# Altium PCB MB694.PCBDOC
Units mm, origin at the board's own origin, x right, y up, seen from the top; angles counter-clockwise.
Board outline 84.13 x 44.13 mm, 4 copper layers (TopLayer, MidLayer1, InternalPlane1, BottomLayer); 23 components, 40 nets, 166 pads, 103 vias.
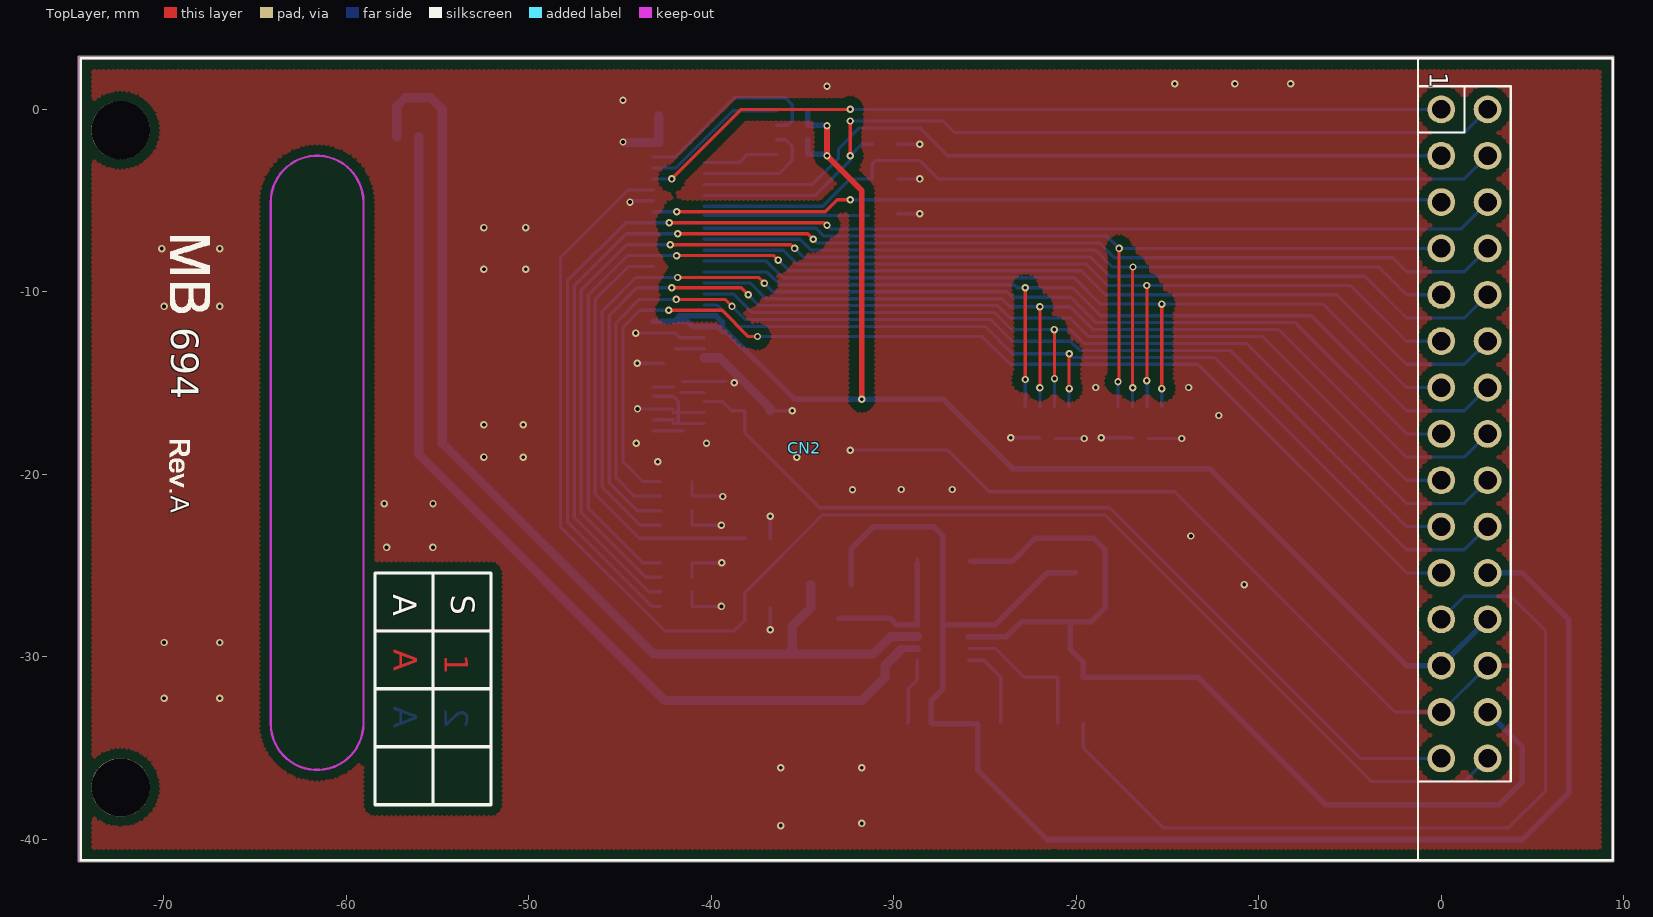
[diagram p0: TopLayer view]
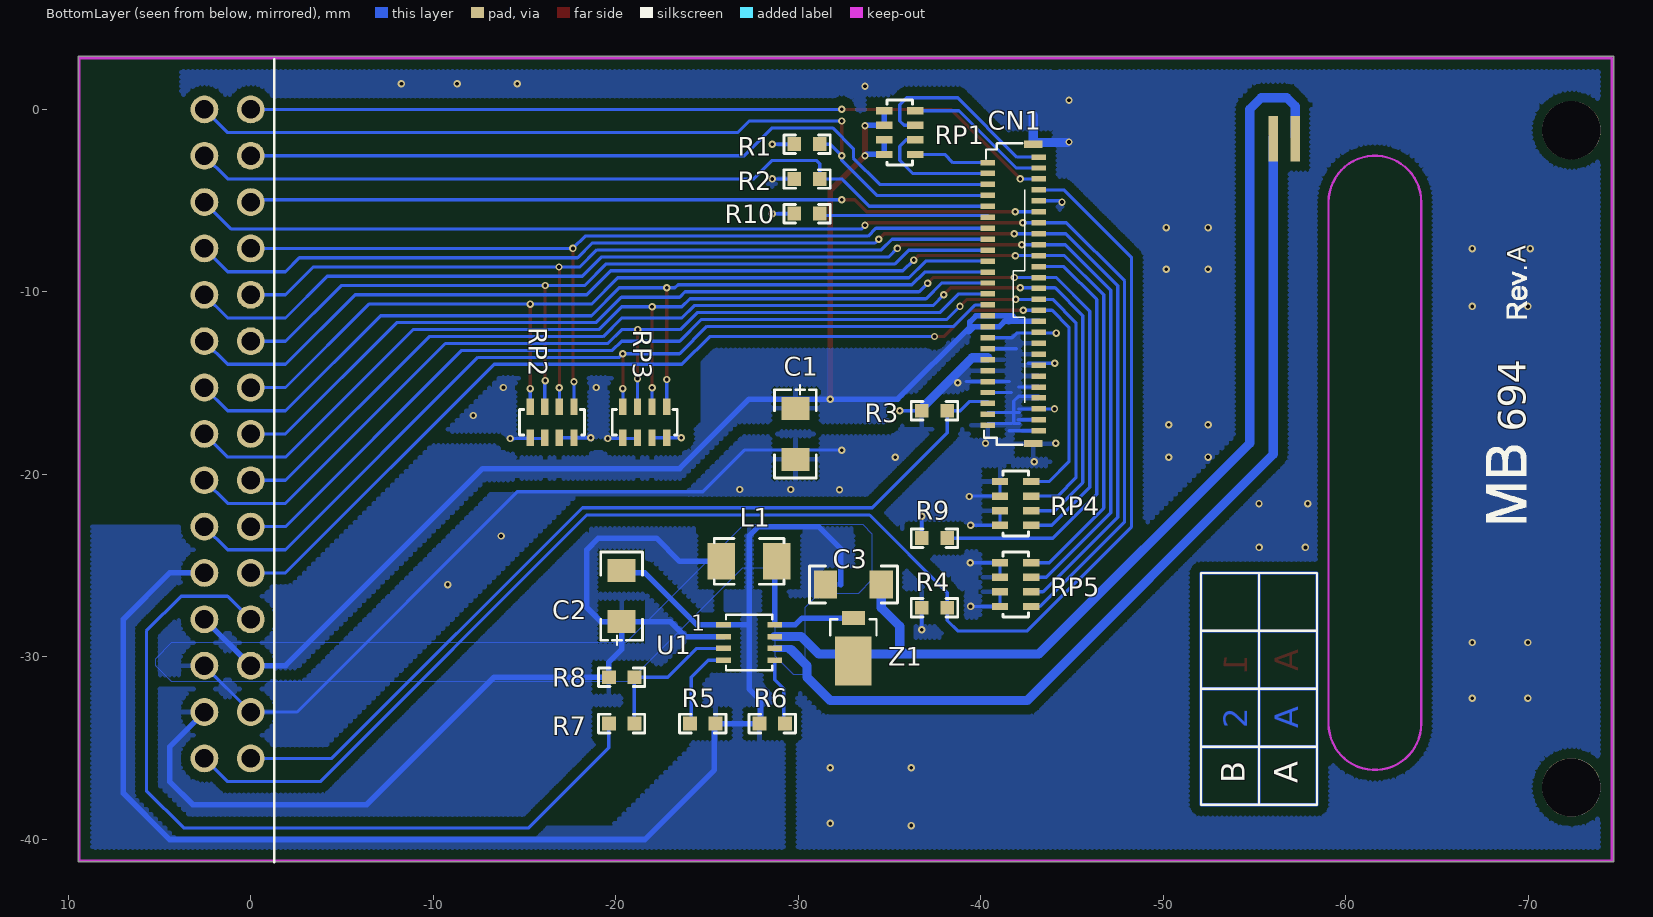
[diagram p1: BottomLayer view, seen from below]
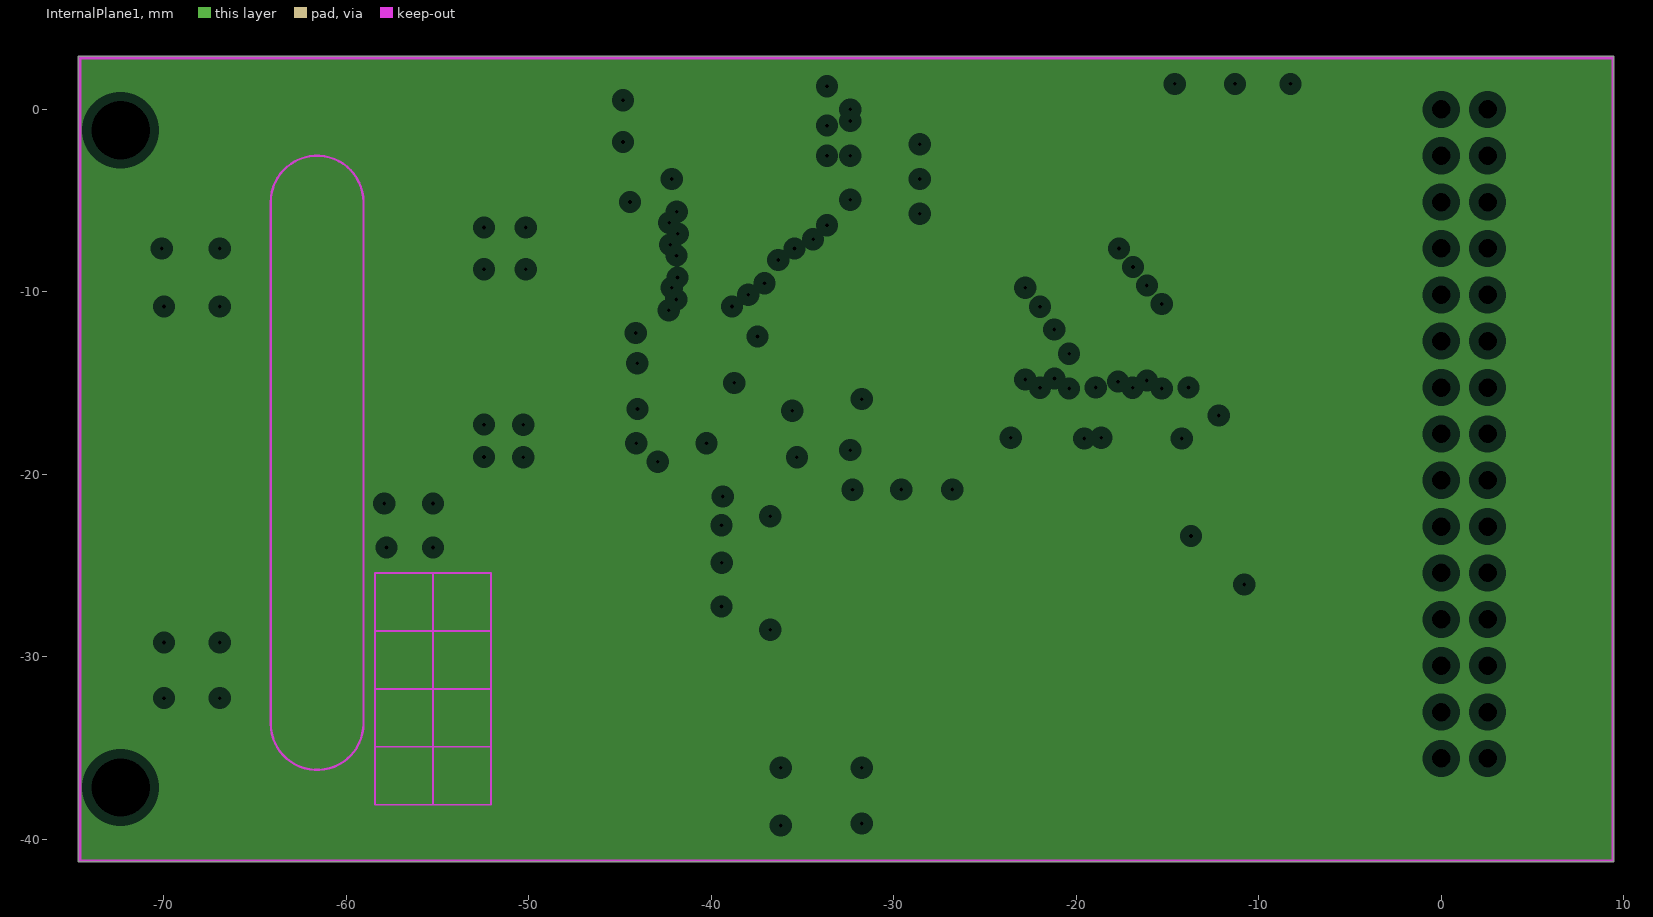
[diagram p2: InternalPlane1, clearances drawn from the general rule]

## Layer stack, top to bottom
TopLayer: signal copper 0.0356
Dielectric: dielectric 0.32, FR-4, Dk 4.8
MidLayer1: signal copper 0.0356
Dielectric: dielectric 0.32, FR-4, Dk 4.8
InternalPlane1: plane copper 0.0356
Dielectric: dielectric 0.32, FR-4, Dk 4.8
BottomLayer: signal copper 0.0356

## Board outline
-74.678,-41.219 9.449,-41.219 9.449,2.908 -74.678,2.908

## Design rules (kind name [scope] priority, off if disabled: settings)
Clearance Clearance_2 [(InPoly)] p1: gap=0.508
Clearance [All] p2: gap=0.203
ComponentClearance [All] p1 off: gap=0.254 collisioncheckmode=0
PlaneClearance [All] p1: clearance=0.508
PlaneConnect [All] p1: planeconnectstyle=Relief reliefexpansion=0.508 reliefentries=4 reliefconductorwidth=0.254 reliefairgap=0.254
PolygonConnect [All] p1: connectstyle=Relief reliefconductorwidth=0.254 reliefentries=4 polygonreliefangle="90 Angle"
RoutingLayers [All] p1: top layer_v5=TRUE mid layer 1_v5=FALSE bottom layer_v5=TRUE
RoutingVias RoutingVias_1 [All] p1: holewidth=0.203 width=0.406 viastyle="Through Hole" minholewidth=0.203 minwidth=0.406 maxholewidth=0.711 maxwidth=1.27
SolderMaskExpansion [All] p1: expansion=0.102
TestPointUsage [All] p1: valid=0 allowmultiple=FALSE
Testpoint [All] p1: side=15 testpointundercomponent=TRUE minsize=1.016 maxsize=2.54 preferedsize=1.524 minholesize=0.508 maxholesize=1.016 preferedholesize=0.813 testpointgrid=0.025 style=1023 order=1234567890
Width Width_1 [InNet('BLGND')] p1: maxlimit=7.62 minlimit=0.178 preferedwidth=0.305
Width Width_2 [InNet('BLVDD')] p2: maxlimit=7.62 minlimit=0.178 preferedwidth=0.305
Width Width_3 [InNet('VDD')] p3: maxlimit=7.62 minlimit=0.178 preferedwidth=0.305
Width [All] p4: maxlimit=7.62 minlimit=0.178 preferedwidth=0.178
14 further rules are at their usual default settings.

## Classes and differential pairs
component class ColorLCD_Module: C1 C2 CN1 L1 R1 R2 R3 R4 R5 R6 R7 R8 U2 Z1
component class ColorLCD_ModuleA: C1 C2 CN1 L1 R1 R2 R3 R4 R5 R6 R7 R8 RP1 RP2 RP3 RP4 RP5 U2 Z1

## Components (designator, comment, footprint, x,y, rotation, side; value= is the part's Value field where it differs from the comment)
C1 "1uF/50V" TAN-A -29.845,-17.78 r270 bottom
C2 "2.2uF" TAN-A -20.32,-26.67 r90 bottom
C3 "1uF/50V" 1206 -33.02,-26.035 r180 bottom
CN1 "FH26-51S-0.3SHW(05)" AM240320B -67.132,-0.151 r180 bottom
CN2 "Connector to Mother board" AM240*320B 5.08,0 r0 top
L1 "22uH" 3225 -27.305,-24.765 r0 bottom
R1 "do not fit" 0603 -30.48,-1.905 r180 bottom
R2 "do not fit" 0603 -30.48,-3.81 r180 bottom
R3 "4K7" 0603 -37.465,-16.51 r180 bottom
R4 "4K7" 0603 -37.465,-27.305 r180 bottom
R5 "100K" 0603 -24.765,-33.655 r0 bottom
R6 "15" 0603 -28.575,-33.655 r180 bottom
R7 "0" 0603 -20.32,-33.655 r0 bottom
R8 "do not fit" 0603 -20.32,-31.115 r0 bottom
R9 "4K7" 0603 -37.465,-23.495 r180 bottom
R10 "4K7" 0603 -30.48,-5.715 r180 bottom
RP1 "10K" RES-4B -35.56,-1.27 r90 bottom
RP2 "do not fit" RES-4B -16.51,-17.145 r0 bottom
RP3 "do not fit" RES-4B -21.59,-17.145 r0 bottom
RP4 "do not fit" RES-4B -41.91,-21.59 r90 bottom
RP5 "do not fit" RES-4B -41.91,-26.035 r90 bottom
U1 "STLD20D-C8" SOT23-8L -27.305,-29.21 r90 bottom
Z1 "STPS1L40M" DO216AA -33.02,-28.575 r90 bottom

## Footprints (in the part's own frame and the unit in brackets; to place one, negate y for a bottom-side part, rotate by r counter-clockwise, add the part's x,y. Pads: shape width x height; smd on the part's side, far side on the other; paste and mask are expansions set on the pad)
0603 [mil]
  rect 30x30 smd: 1(-27.5,0) 2(27.5,0)
  silkscreen extent -50,-20 50,20
1206 [mil]
  rect 50x60 smd: 1(-60,0) 2(60,0)
  silkscreen extent -95,-40 95,40
3225 [mm]
  rect 1.5x2 smd: 1(1.524,0) 2(-1.524,0)
  silkscreen extent -1.91,-1.25 1.91,1.25
AM240*320B [mil]
  round 125.98 hole 125.98 unplated: 0(-3048.94,-1462.72) 0(-3048.94,-1462.72) 0(-3048.94,-45)
  round 60 hole 40: 1(-200,0) 2(-100,0) 3(-200,-100) 4(-100,-100) 5(-200,-200) 6(-100,-200) 7(-200,-300) 8(-100,-300) 9(-200,-400) 10(-100,-400) 11(-200,-500) 12(-100,-500) 13(-200,-600) 14(-100,-600) 15(-200,-700) 16(-100,-700) 17(-200,-800) 18(-100,-800) 19(-200,-900) 20(-100,-900) 21(-200,-1000) 22(-100,-1000) 23(-200,-1100) 24(-100,-1100) 25(-200,-1200) 26(-100,-1200) 27(-200,-1300) 28(-100,-1300) 29(-200,-1400) 30(-100,-1400)
  silkscreen extent -3135,-1620 170,110
AM240320B [mm]
  rect 1x0.4 smd: 0(-24.252,-18.161) 0(-24.252,-1.761)
  rect 0.8x0.3 smd: 1(-23.952,-2.461) 2(-26.752,-2.761) 3(-23.952,-3.061) 4(-26.752,-3.361) 5(-23.952,-3.661) 6(-26.752,-3.961) 7(-23.952,-4.261) 8(-26.752,-4.561) 9(-23.952,-4.861) 10(-26.752,-5.161) 11(-23.952,-5.461) 12(-26.752,-5.761) 13(-23.952,-6.061) 14(-26.752,-6.361) 15(-23.952,-6.661) 16(-26.752,-6.961) 17(-23.952,-7.261) 18(-26.752,-7.561) 19(-23.952,-7.861) 20(-26.752,-8.161) 21(-23.952,-8.461) 22(-26.752,-8.761) 23(-23.952,-9.061) 24(-26.752,-9.361) 25(-23.952,-9.661) 26(-26.752,-9.961) 27(-23.952,-10.261) 28(-26.752,-10.561) 29(-23.952,-10.861) 30(-26.752,-11.161) 31(-23.952,-11.461) 32(-26.752,-11.761) 33(-23.952,-12.061) 34(-26.752,-12.361) 35(-23.952,-12.661) 36(-26.752,-12.961) 37(-23.952,-13.261) 38(-26.752,-13.561) 39(-23.952,-13.861) 40(-26.752,-14.161) 41(-23.952,-14.461) 42(-26.752,-14.761) 43(-23.952,-15.061) 44(-26.752,-15.361) 45(-23.952,-15.661) 46(-26.752,-15.961) 47(-23.952,-16.261) 48(-26.752,-16.561) 49(-23.952,-16.861) 50(-26.752,-17.161) 51(-23.952,-17.461)
  rect 0.508x2.5 smd: 52(-9.902,-1.453) 53(-11.102,-1.453)
  silkscreen extent -65.85,-41.1 -24.72,2.9
DO216AA [mm]
  rect 0.762x1.27 smd: 1(0.699,0)
  rect 2.67x2 smd: 2(-1.653,0)
  silkscreen extent -0.25,-1.27 0.64,1.27
RES-4B [mm]
  rect 0.4x0.889 smd: 1(1.2,-0.851) 2(1.2,0.851) 3(0.4,-0.851) 4(0.4,0.851) 5(-0.4,-0.851) 6(-0.4,0.851) 7(-1.2,-0.851) 8(-1.2,0.851)
  silkscreen extent -1.78,-0.7 1.78,0.7
SOT23-8L [mm]
  rect 0.3x0.8 smd: 1(0.975,1.4) 2(0.325,1.4) 3(-0.325,1.4) 4(-0.975,1.4) 5(-0.975,-1.4) 6(-0.325,-1.4) 7(0.325,-1.4) 8(0.975,-1.4)
  silkscreen extent -1.52,-1.27 1.52,1.27
TAN-A [mil]
  rect 50x60 smd: 1(-55,0) 2(55,0)
  silkscreen extent -105,-45 95,45

## Via types
v1: diameter 0.406, hole 0.203, TopLayer to BottomLayer, 103 vias

## Nets (pads, with @x,y where several pads share a name; then routed paths per layer and width w, separated by ;. In a path a pad name is that pad's centre, name@x,y a point inside that pad or via, vN(x,y) a via of type N, cw(c..) or ccw(c..) an arc to the next point about the centre after c; other vN are vias at no path point)
#RESET: CN1.11 CN2.5 | length 43.3
  TopLayer w0.178: v1(-41.886,-5.612) -33.755,-5.612 -33.096,-4.953 v1(-32.385,-4.953)
  BottomLayer w0.178: CN1.11 v1(-41.886,-5.612) ; v1(-32.385,-4.953) CN2.5@-0.127,-4.953
A: C3.2 CN1.52 U1.7 Z1.2 | length 59.8
  BottomLayer w0.178: -36.068,-29.845 -35.56,-29.337 -35.052,-29.845
  BottomLayer w0.508: CN1.52@-57.23,-1.504 -57.23,0.174 -56.769,0.635 -55.372,0.635 -54.737,0 -54.737,-18.288 -43.18,-29.845 -31.115,-29.845 -30.155,-28.885 U1.7 ; -35.56,-29.845 -35.56,-28.321 -34.544,-27.305 C3.2
BL_CONTROL: CN2.23 R7.2 | length 45.1
  BottomLayer w0.178: R7.2 -19.621,-34.989 -15.24,-39.37 3.683,-39.37 5.715,-37.338 5.715,-28.575 3.81,-26.67 1.27,-26.67 CN2.23
BLGND: C2.2 C3.1 CN2.22 R5.1 R6.1 U1.1 | length 81.6
  BottomLayer w0.305: -32.322,-26.035 -32.322,-24.066 -31.115,-22.86 -27.813,-22.86 -27.305,-23.368 -27.305,-31.75 -27.94,-32.385 R6.1@-27.94,-33.591 ; R6.1 R5.1 -25.4,-33.718 -25.4,-36.195 -21.59,-40.005 4.445,-40.005 6.985,-37.465 6.985,-27.94 4.445,-25.4 CN2.22 ; -27.305,-28.321 -27.219,-28.235 -24.425,-28.235 -21.59,-25.4 C2.2@-20.066,-25.4
BLVDD: C2.1 CN2.28 L1.1 R8.2 U1.2 | length 54.9
  BottomLayer w0.305: U1.2 -23.805,-28.885 -22.987,-28.067 -19.177,-28.067 -18.415,-27.305 -18.415,-24.13 -19.05,-23.495 -22.225,-23.495 -23.495,-24.765 L1.1 ; C2.1 -20.32,-29.591 -19.621,-30.29 R8.2 -13.335,-31.115 -6.35,-38.1 3.175,-38.1 4.445,-36.83 4.445,-34.925 CN2.28
CS: CN1.5 CN2.1 | length 44.8
  TopLayer w0.178: v1(-42.166,-3.812) -38.354,0 v1(-32.385,0)
  BottomLayer w0.178: CN1.5 v1(-42.166,-3.812) ; v1(-32.385,0) CN2.1
DOTCLK: CN1.2 RP1.7 | length 4.2
  BottomLayer w0.178: CN1.2 -38.472,-2.912 -38.03,-2.47 RP1.7
ENABLE: CN1.1 RP1.3 | length 11
  BottomLayer w0.178: CN1.1 -41.982,-2.612 -38.735,0.635 -35.941,0.635 -35.56,0.254 -35.56,-0.635 -35.795,-0.87 RP1.3
GND: C1.2 CN1.0 CN1.9 CN1.33 CN1.34 CN1.35 CN1.36 CN1.37 CN1.38 CN1.39 CN1.40 CN1.41 CN1.42 CN1.43 CN1.44 CN1.45 CN1.47 CN1.48 CN1.49 CN1.50 CN1.51 CN2.26 CN2.27 R1.1 R2.1 R3.1 R4.1 R9.1 R10.1 RP2.2 RP2.4 RP2.6 RP2.8 RP3.2 RP3.4 RP3.6 RP3.8 RP4.2 RP4.4 RP4.6 RP4.8 RP5.2 RP5.4 RP5.6 RP5.8 | length 97.7
  BottomLayer w0.178: v1(-44.45,-5.08) -44.382,-5.012 CN1.9 ; v1(-44.131,-12.257) -41.972,-12.257 -41.717,-12.512 CN1.34 ; v1(-44.049,-13.912) -42.603,-13.912 ; v1(-44.04,-16.412) -42.068,-16.412 ; CN1.51 -41.544,-17.612 ; CN1.49 -42.044,-17.012 ; CN1.45@-43.18,-15.712 -42.073,-15.712 -41.808,-15.977 -41.808,-17.212 -42.118,-17.212 ; CN1.43 -42.066,-15.212 ; -42.118,-16.612 CN1.48@-40.38,-16.612 ; -41.943,-13.112 CN1.36 ; -41.716,-17.212 CN1.50@-40.38,-17.212 ; -41.676,-15.512 CN1.44 ; -41.575,-14.912 -39.197,-14.912 ; RP5.6 RP5.8 v1(-39.44,-27.235) ; RP5.4 RP5.2 v1(-39.427,-24.835) ; RP4.6 RP4.8 v1(-39.44,-22.79) ; RP4.2 RP4.4 -39.389,-21.19 v1(-39.37,-21.209) ; v1(-36.767,-28.511) R4.1 ; R9.1 v1(-36.767,-22.288) ; R3.1 v1(-35.56,-16.51) ; v1(-32.385,-18.669) -27.051,-18.669 -24.765,-20.955 -14.605,-20.955 -2.54,-33.02 CN2.27 CN2.26 ; R10.1 v1(-28.575,-5.715) ; R2.1 v1(-28.575,-3.81) ; R1.1 v1(-28.575,-1.905) ; v1(-23.584,-17.996) RP3.6 ; RP3.4@-21.152,-18.034 v1(-19.558,-18.034) ; v1(-18.631,-17.996) RP2.6 RP2.6@-16.891,-18.015 ; RP2.4@-16.072,-18.034 v1(-14.224,-18.034)
  BottomLayer w0.508: v1@-44.74,-1.812 -42.88,-1.812 -42.88,-0.342 ; CN1.38@-40.38,-13.612 -39.535,-13.612 -36.767,-16.381 R3.1
  other v1: -36.197,-39.243 -31.75,-39.123 -36.195,-36.075 -31.75,-36.075 -69.979,-32.258 -66.931,-32.258 -69.979,-29.21 -66.931,-29.21 -10.797,-26.035 -57.787,-24.003 -55.247,-24.003 -13.716,-23.375 -57.912,-21.597 -55.245,-21.597 -32.258,-20.835 -29.593,-20.828 -26.799,-20.828 -42.926,-19.311 -52.453,-19.05 -50.292,-19.057 -35.306,-19.057 -44.107,-18.297 -40.259,-18.295 -52.453,-17.272 -50.292,-17.279 -12.192,-16.771 -18.925,-15.24 -13.845,-15.24 -38.737,-14.986 -69.979,-10.795 -66.931,-10.795 -52.453,-8.763 -50.167,-8.763 -70.104,-7.627 -66.929,-7.627 -52.453,-6.477 -50.167,-6.477 -44.831,-1.785 -44.831,0.501 -33.655,1.263 -14.607,1.397 -11.305,1.397 -8.257,1.397
HSYNC: CN1.3 RP1.1 | length 8.1
  BottomLayer w0.178: CN1.3 -41.947,-3.212 -38.805,-0.07 RP1.1
K: CN1.53 U1.6 | length 51.8
  BottomLayer w0.381: -29.535,-29.535 U1.6
  BottomLayer w0.508: CN1.53@-56.03,-1.504 -56.03,-18.9 -42.545,-32.385 -31.75,-32.385 -30.48,-31.115 -30.48,-30.48 -29.596,-29.596 -29.562,-29.596
NetL1_2: L1.2 U1.8 Z1.1 | length 8.1
  BottomLayer w0.178: L1.2@-28.705,-24.889 L1.2@-28.705,-24.641
  BottomLayer w0.305: Z1.1 -30.203,-27.877 -29.845,-28.235 U1.8 L1.2@-28.705,-24.889
NetR7_1: R7.1 R8.1 U1.3 | length 8.1
  BottomLayer w0.178: U1.3 -24.44,-29.535 -22.86,-31.115 R8.1 R7.1
NetU1_4: R5.2 U1.4 | length 4.6
  BottomLayer w0.178: U1.4 -25.06,-30.185 -24.13,-31.115 R5.2@-24.13,-33.591
NetU1_5: R6.2 U1.5 | length 3.7
  BottomLayer w0.178: R6.2 -29.21,-33.591 -29.21,-31.75 -28.705,-31.245 U1.5
PD0: CN1.12 R10.2 | length 9
  BottomLayer w0.178: CN1.12@-40.38,-5.812 R10.2@-31.399,-5.812
PD1: CN1.13 CN2.6 RP5.7 | length 72.7
  TopLayer w0.178: v1(-42.302,-6.212) -33.793,-6.212 v1(-33.655,-6.35)
  BottomLayer w0.178: RP5.7 -43.25,-27.235 -47.879,-22.606 -47.879,-9.398 -44.693,-6.212 v1(-42.302,-6.212) ; v1(-33.655,-6.35) -33.445,-6.56 1.06,-6.56 CN2.6
PD2: CN1.14 CN2.7 RP2.7 | length 49.5
  TopLayer w0.178: v1(-17.71,-14.916) -17.653,-14.859 v1(-17.653,-7.62)
  BottomLayer w0.178: CN1.14 -34.255,-6.512 -33.826,-6.941 -18.332,-6.941 v1(-17.653,-7.62) CN2.7 ; RP2.7 v1(-17.71,-14.916)
PD3: CN1.15 CN2.8 RP5.5 | length 71.7
  TopLayer w0.178: v1(-41.829,-6.812) -34.717,-6.812 v1(-34.417,-7.112)
  BottomLayer w0.178: RP5.5 -43.415,-26.435 -47.498,-22.352 -47.498,-9.652 -44.658,-6.812 v1(-41.829,-6.812) ; v1(-34.417,-7.112) -34.207,-7.322 -18.713,-7.322 -17.907,-8.128 -2.667,-8.128 -1.905,-8.89 1.27,-8.89 CN2.8
PD4: CN1.16 CN2.9 RP2.5 | length 49.3
  TopLayer w0.178: v1(-16.91,-15.259) -16.91,-8.655 v1(-16.891,-8.636)
  BottomLayer w0.178: CN1.16 -35.135,-7.112 -34.544,-7.703 -18.967,-7.703 -18.034,-8.636 -3.429,-8.636 -1.905,-10.16 CN2.9 ; RP2.5 v1(-16.91,-15.259)
PD5: CN1.17 CN2.10 RP5.3 | length 70.9
  TopLayer w0.178: v1(-42.245,-7.412) -35.641,-7.412 v1(-35.433,-7.62)
  BottomLayer w0.178: RP5.3 -43.58,-25.635 -47.117,-22.098 -47.117,-9.906 -44.623,-7.412 v1(-42.245,-7.412) ; v1(-35.433,-7.62) -34.969,-8.084 -19.221,-8.084 -18.161,-9.144 -4.191,-9.144 -1.905,-11.43 1.27,-11.43 CN2.10
PD6: CN1.18 CN2.11 RP2.3 | length 49.1
  TopLayer w0.178: v1(-16.129,-14.859) v1(-16.129,-9.652)
  BottomLayer w0.178: CN1.18 -36.059,-7.712 -35.306,-8.465 -19.475,-8.465 -18.288,-9.652 -4.953,-9.652 -1.905,-12.7 CN2.11 ; RP2.3 v1@-16.11,-14.878
PD7: CN1.19 CN2.12 RP5.1 | length 70.1
  TopLayer w0.178: v1(-41.899,-8.012) -36.565,-8.012 v1(-36.322,-8.255)
  BottomLayer w0.178: RP5.1 -43.745,-24.835 -46.736,-21.844 -46.736,-10.16 -44.588,-8.012 v1(-41.899,-8.012) ; v1(-36.322,-8.255) -35.731,-8.846 -19.729,-8.846 -18.415,-10.16 -5.715,-10.16 -1.905,-13.97 1.27,-13.97 CN2.12
PD8: CN1.20 CN2.13 RP2.1 | length 48.9
  TopLayer w0.178: v1(-15.31,-15.297) v1(-15.31,-10.668)
  BottomLayer w0.178: CN1.20 -36.983,-8.312 -36.068,-9.227 -20.11,-9.227 -18.669,-10.668 -6.477,-10.668 -1.905,-15.24 CN2.13 ; RP2.1 v1(-15.31,-15.297)
PD9: CN1.21 R9.2 | length 23.8
  BottomLayer w0.178: CN1.21 -44.553,-8.612 -46.355,-10.414 -46.355,-21.082 -43.942,-23.495 R9.2
PD10: CN1.22 CN2.14 RP3.7 | length 53.1
  TopLayer w0.178: v1(-22.79,-14.802) v1(-22.79,-9.779)
  BottomLayer w0.178: CN1.22 -36.922,-8.912 -36.226,-9.608 -23.412,-9.608 -23.241,-9.779 -20.193,-9.779 -18.669,-11.303 -7.112,-11.303 -1.905,-16.51 1.27,-16.51 CN2.14 ; RP3.7 v1(-22.79,-14.802)
PD11: CN1.23 CN2.15 RP4.7 | length 64
  TopLayer w0.178: v1(-41.842,-9.212) -37.397,-9.212 v1(-37.084,-9.525)
  BottomLayer w0.178: RP4.7 -43.885,-22.79 -45.974,-20.701 -45.974,-11.049 -44.137,-9.212 v1(-41.842,-9.212) ; v1(-37.084,-9.525) -36.62,-9.989 -23.793,-9.989 -23.495,-10.287 -20.308,-10.287 -18.911,-11.684 -8.001,-11.684 -1.905,-17.78 CN2.15
PD12: CN1.24 CN2.16 RP3.5 | length 52.9
  TopLayer w0.178: v1(-21.99,-15.259) v1(-21.99,-10.814)
  BottomLayer w0.178: CN1.24 -37.859,-9.512 -37.001,-10.37 -24.066,-10.37 -23.622,-10.814 -20.32,-10.814 -19.069,-12.065 -8.89,-12.065 -1.905,-19.05 1.27,-19.05 CN2.16 ; RP3.5 v1(-21.99,-15.259)
PD13: CN1.25 CN2.17 RP4.5 | length 63.3
  TopLayer w0.178: v1(-42.164,-9.779) -38.354,-9.779 v1(-37.973,-10.16)
  BottomLayer w0.178: RP4.5 -44.05,-21.99 -45.593,-20.447 -45.593,-11.303 -44.069,-9.779 v1(-42.164,-9.779) v1@-42.231,-9.712 ; v1(-37.973,-10.16) -37.382,-10.751 -24.301,-10.751 -23.622,-11.43 -20.32,-11.43 -19.304,-12.446 -9.779,-12.446 -1.905,-20.32 CN2.17
PD14: CN1.26 CN2.18 RP3.3 | length 52.4
  TopLayer w0.178: v1(-21.209,-12.065) -21.19,-12.084 v1(-21.19,-14.751)
  BottomLayer w0.178: CN1.26 -38.783,-10.112 -37.763,-11.132 -24.459,-11.132 -23.526,-12.065 -20.32,-12.065 -19.558,-12.827 -10.668,-12.827 -1.905,-21.59 1.27,-21.59 CN2.18 ; RP3.3 v1(-21.19,-14.751)
PD15: CN1.27 CN2.19 RP4.3 | length 62.3
  TopLayer w0.178: v1(-41.912,-10.412) -39.245,-10.412 v1(-38.862,-10.795)
  BottomLayer w0.178: RP4.3 -44.215,-21.19 -45.212,-20.193 -45.212,-11.684 -43.94,-10.412 v1(-41.912,-10.412) ; v1(-38.862,-10.795) -38.144,-11.513 -24.682,-11.513 -23.495,-12.7 -20.32,-12.7 -19.812,-13.208 -11.557,-13.208 -1.905,-22.86 CN2.19
PD16: CN1.28 CN2.20 RP3.1 | length 51.9
  TopLayer w0.178: v1(-20.39,-15.297) v1(-20.39,-13.392)
  BottomLayer w0.178: CN1.28 -39.707,-10.712 -38.525,-11.894 -24.993,-11.894 -23.495,-13.392 v1(-20.39,-13.392) -20.193,-13.589 -12.446,-13.589 -1.905,-24.13 1.27,-24.13 CN2.20 ; RP3.1 v1(-20.39,-15.297)
PD17: CN1.29 CN2.21 RP4.1 | length 61.1
  TopLayer w0.178: v1(-42.328,-11.012) -39.407,-11.012 -37.973,-12.446 v1(-37.465,-12.446)
  BottomLayer w0.178: RP4.1 -43.745,-20.39 -44.831,-19.304 -44.831,-11.938 -43.905,-11.012 v1(-42.328,-11.012) ; v1(-37.465,-12.446) -25.146,-12.446 -23.622,-13.97 -13.335,-13.97 -1.905,-25.4 CN2.21
RD: CN1.10 CN2.4 R2.2 | length 45.4
  BottomLayer w0.178: CN1.10 -33.887,-5.312 -32.385,-3.81 R2.2 -31.178,-2.984 -30.988,-2.794 -28.575,-2.794 -27.559,-3.81 1.27,-3.81 CN2.4
RS: CN1.8 CN2.2 R1.2 | length 48.1
  TopLayer w0.178: v1(-32.385,-2.54) v1(-32.385,-0.635)
  BottomLayer w0.178: CN1.8 -34.303,-4.712 -32.385,-2.794 v1(-32.385,-2.54) -31.75,-1.905 R1.2 ; v1(-32.385,-0.635) -27.305,-0.635 -26.67,-1.27 1.27,-1.27 CN2.2
SDI: CN1.7 CN2.30 R4.2 | length 84.6
  BottomLayer w0.178: CN1.7 -44.544,-4.412 -48.26,-8.128 -48.26,-22.86 -42.545,-28.575 -38.735,-28.575 -38.163,-28.003 -38.163,-26.479 -33.909,-22.225 -18.415,-22.225 -3.81,-36.83 1.27,-36.83 CN2.30
SDO: CN1.46 CN2.29 R3.2 | length 49.2
  BottomLayer w0.178: CN1.46@-40.38,-16.012 -39.37,-16.012 -38.872,-16.51 R3.2 -38.163,-17.716 -34.051,-21.829 -18.176,-21.829 -4.445,-35.56 CN2.29
VDD: C1.1 CN1.30 CN1.31 CN1.32 CN2.24 CN2.25 RP1.2 RP1.4 RP1.6 RP1.8 | length 77.9
  TopLayer w0.305: v1(-33.655,-0.889) v1(-33.655,-2.54) -31.75,-4.445 v1(-31.75,-15.875)
  BottomLayer w0.305: CN1.31 -42.045,-11.612 -41.745,-11.312 -39.735,-11.312 -39.403,-11.645 -39.403,-11.912 ; -42.291,-11.612 -41.3,-11.612 -41,-11.912 CN1.32 -39.403,-11.912 ; -39.624,-11.912 -39.345,-12.191 ; RP1.6 RP1.8 -33.725,-2.47 v1(-33.655,-2.54) ; RP1.2 RP1.4 v1@-33.674,-0.87 ; CN2.24 CN2.25 -1.905,-30.48 -12.7,-19.685 -23.495,-19.685 -27.305,-15.875 -35.44,-15.875 -39.403,-11.912
VSYNC: CN1.4 RP1.5 | length 6.9
  BottomLayer w0.178: CN1.4 -36.278,-3.512 -35.56,-2.794 -35.56,-2.032 -35.922,-1.67 RP1.5
WR: CN1.6 CN2.3 | length 42.6
  BottomLayer w0.178: CN1.6 -34.465,-4.112 -33.02,-2.667 -33.02,-2.159 -31.877,-1.016 -28.575,-1.016 -27.051,-2.54 CN2.3
pads on no net: CN2.0
copper on no net: | length 140.1
  TopLayer w0.127: -58.42,-34.925 -52.07,-34.925 ; -58.42,-31.75 -52.07,-31.75 ; -58.42,-28.575 -57.785,-28.575 -52.07,-28.575 ; -58.039,-25.4 -58.42,-25.4 ; -55.245,-38.1 -55.245,-25.4 ; -58.42,-25.4 -58.42,-38.1 -57.785,-38.1 -52.07,-38.1 -52.07,-28.575 ; -58.42,-25.4 -57.785,-25.4 -52.07,-25.4 -52.07,-28.575
  BottomLayer w0.178: -58.42,-34.925 -55.245,-34.925 -52.07,-34.925 ; -58.42,-31.75 -55.245,-31.75 -52.07,-31.75 ; -58.42,-28.575 -55.245,-28.575 ; -55.245,-25.4 -55.245,-28.575 ; -55.245,-38.1 -52.07,-38.1 -52.07,-28.575 ; -55.245,-38.1 -58.42,-38.1 -58.42,-25.4 -52.07,-25.4 -52.07,-28.575 ; -55.245,-38.1 -55.245,-28.575 ; -55.245,-28.575 -52.07,-28.575

## Polygon pours and split planes (outlines as drawn)
GND on TopLayer (hatched 90Degree grid 0.254 track 0.254, remove dead copper): -74.676,2.794 9.652,2.794 9.652,-41.148 -74.803,-41.148 -74.803,2.794
SDI on BottomLayer (hatched 90Degree grid 0.508 track 0.635, remove dead copper): 4.318,-29.21 -20.574,-29.21 -27.051,-22.733 -33.528,-22.733 -34.036,-23.241 -34.036,-25.781 -33.274,-26.543 -31.115,-26.543 -30.353,-27.305 -30.353,-30.988 -29.765,-30.988 -28.749,-29.972 -28.749,-25.781 -28.114,-25.146 -26.924,-25.146 -20.701,-31.369 4.318,-31.369 5.078,-30.609 5.207,-30.48 5.207,-30.099
BLGND on BottomLayer (hatched 90Degree grid 0.254 track 0.254, remove dead copper): -33.02,-25.4 -33.02,-22.225 -26.035,-22.225 -26.035,-30.48 -24.13,-30.48 -24.13,-34.925 -19.685,-39.37 3.683,-39.37 5.715,-37.338 5.715,-28.575 3.81,-26.67 1.27,-26.67 1.27,-22.86 9.271,-22.86 9.271,-41.148 -29.21,-41.148 -29.21,-26.67 -33.02,-26.67
BLVDD on BottomLayer (hatched 90Degree grid 0.254 track 0.254, remove dead copper): -27.432,-22.949 -17.718,-22.949 -4.426,-36.241 2.54,-36.241 2.54,-31.75 5.715,-31.75 5.715,-39.885 -15.24,-39.885 -25.788,-29.337 -26.797,-28.328 -27.432,-27.693
VDD on BottomLayer (hatched 90Degree grid 0.254 track 0.254, remove dead copper): -43.942,-10.312 -39.243,-10.312 -37.109,-12.446 -26.162,-12.446 -24.765,-13.843 -24.765,-17.145 -23.495,-18.415 -8.782,-18.415 -1.797,-25.4 2.921,-25.4 2.921,-30.607 -2.54,-30.607 -12.827,-20.32 -23.495,-20.32 -26.67,-17.145 -34.925,-17.145 -40.258,-11.812 -43.942,-11.812
GND on BottomLayer (hatched 90Degree grid 0.254 track 0.254, remove dead copper): -74.549,2.794 3.81,2.794 3.81,-22.606 9.398,-22.606 9.398,-41.275 -74.676,-41.275 -74.676,2.794

## Keep-outs
KeepOutLayer:
  lines w0.102: -58.42,-34.925 -55.245,-34.925 -52.07,-34.925 ; -58.42,-31.75 -55.245,-31.75 -52.07,-31.75 ; -55.245,-25.4 -55.245,-28.575 ; -58.42,-28.575 -55.245,-28.575 ; -58.42,-28.575 -58.42,-38.1 -55.245,-38.1 ; -58.42,-28.575 -58.42,-25.4 -52.07,-25.4 -52.07,-28.575 ; -55.245,-38.1 -55.245,-28.575 ; -55.245,-38.1 -52.07,-38.1 -52.07,-28.575 ; -55.245,-28.575 -52.07,-28.575
  lines w0.127: -74.615,-41.155 9.385,-41.155 9.385,2.845 9.385,2.794 -74.564,2.794 -74.564,-41.155 ; -64.135,-33.655 ccw(c-61.595,-33.655) -59.055,-33.655 -59.055,-5.08 ccw(c-61.595,-5.08) -64.135,-5.08 -64.135,-33.655

## Other copper
TopLayer:
  text "A" at -57.404,-29.591 h1.27 r270
  text "1" at -54.61,-29.845 h1.27 r270
BottomLayer:
  text "A" at -57.404,-33.909 h1.27 r270
  text "2" at -54.61,-33.909 h1.27 r270

## Silkscreen, mask and mechanical layers (free items; w line width, h text height)
TopOverlay:
  drawing of 631 lines, arcs and shapes, not listed
  text "1" at -0.635,2.032 h1.02 r270
  text "694" at -69.598,-11.931 h1.52 r270
  text "A" at -69.599,-21.176 h1.02 r270
  text "A" at -57.429,-26.568 h1.27 r270
  text "S" at -54.254,-26.594 h1.27 r270
BottomOverlay:
  drawing of 631 lines, arcs and shapes, not listed
  text "A" at -69.855,-8.407 h1.02 r270
  text "694" at -69.853,-17.653 h1.52 r270
  text "1" at -24.13,-28.575 h0.89
  text "A" at -57.379,-36.932 h1.27 r270
  text "B" at -54.458,-36.932 h1.27 r270
Mechanical1:
  lines w0.127: -59.055,-5.207 -59.055,-33.655 cw(c-61.595,-33.655) -64.135,-33.655 -64.135,-5.08 cw(c-61.595,-5.08) -59.055,-5.08 ; -74.549,-41.155 -74.549,2.794 9.398,2.845 9.398,-41.143 9.385,-41.155 -74.549,-41.155